# EAGLE board Conv_LLS (EAGLE 9.6.2)
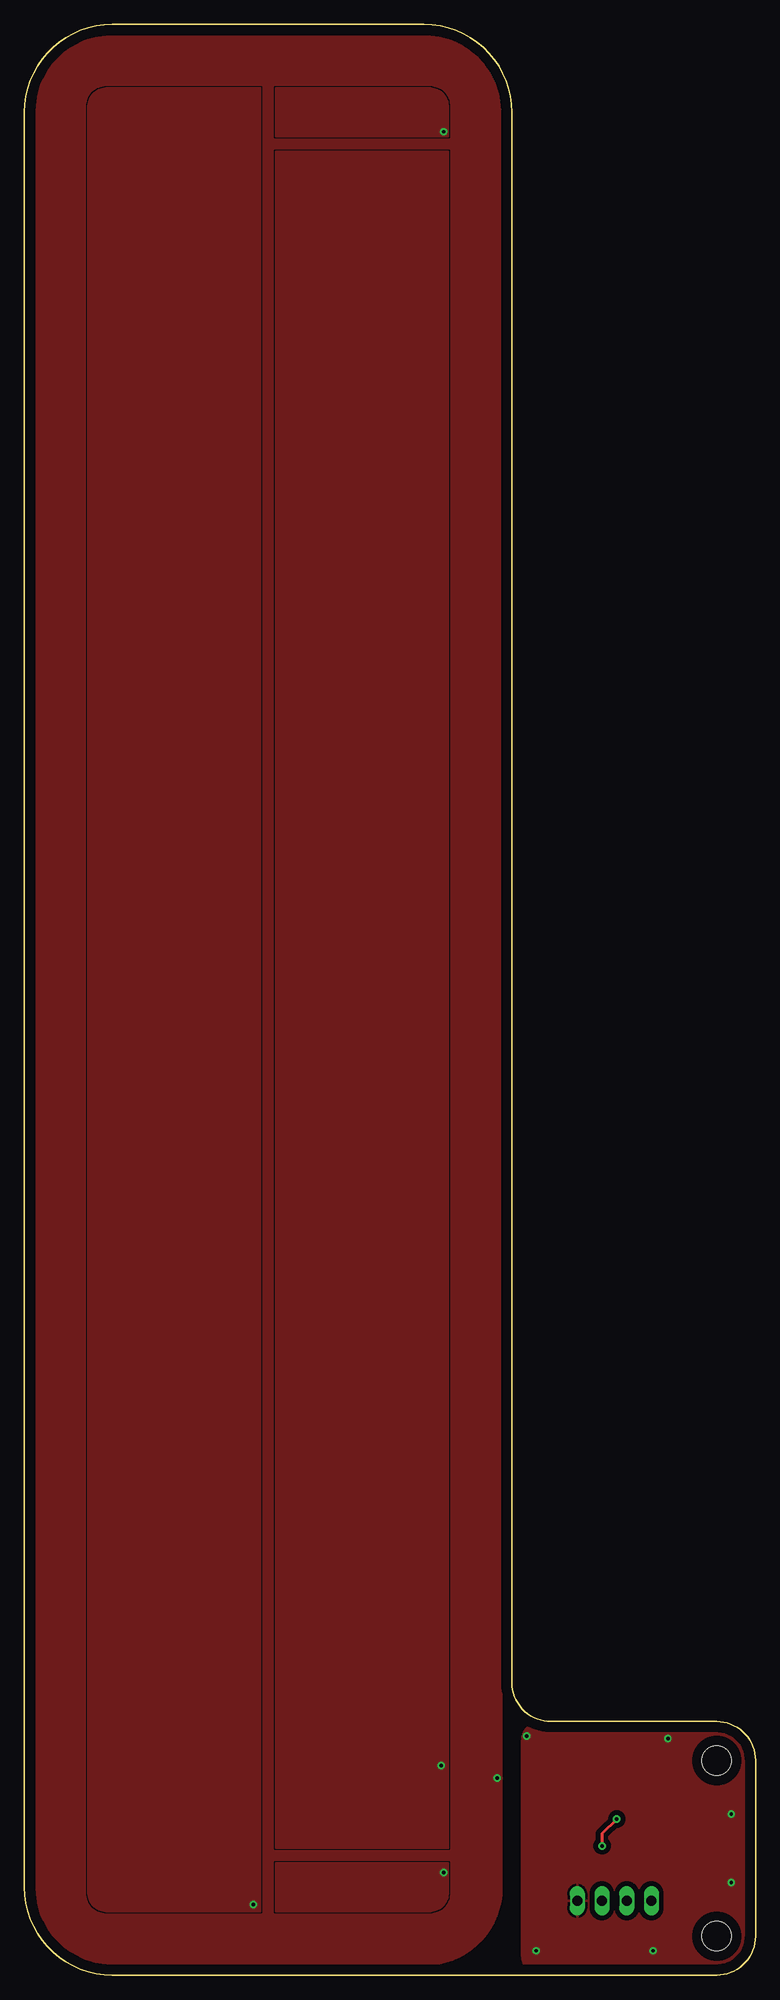
[diagram p0: board, top side]
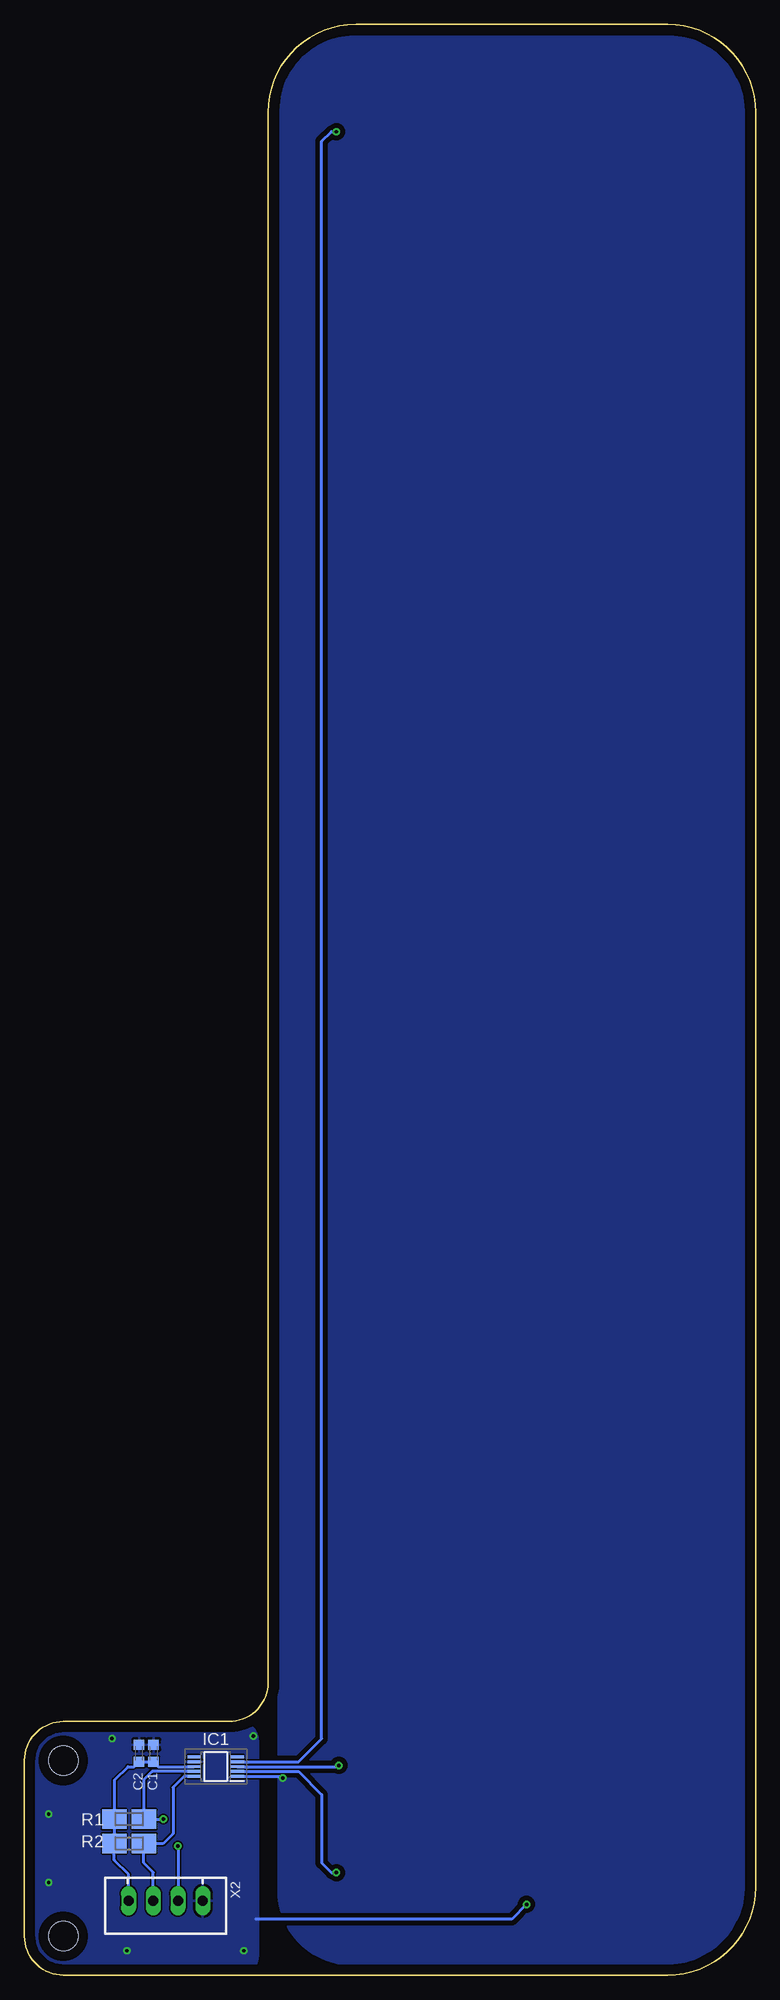
[diagram p1: board, bottom side, seen from below]

Size 75 x 200 mm. Coordinates in mm from the lower left corner, seen from the top.
Outline: 50,191 50,30 arc90 54,26 71,26 arc-90 75,22 75,4 arc-90 71,0 9,0 arc-90 0,9 0,191 arc-90 9,200 41,200 arc-90 50,191
Copper layers (1*16): Top 0.035mm / dielectric 1.5mm / Bottom 0.035mm
Design rules "default": minimum track width 6mil, minimum drill 0.35mm, track to track 6mil, track to pad 6mil, pad to pad 6mil, via to via 6mil, smd to smd 6mil, copper to edge 40mil, drill to drill 6mil, minimum pad ring 10mil, minimum via ring 8mil, stop-mask expansion 4mil, vias tented up to drill 0mil, thermal gap 10mil
Holes 3 mm at 71,4 71,22

## Footprints (pad centres in the part's own frame; a part is rotated, then mirrored left to right if it is on the bottom)
C0603K = smd 1.05 x 1.08: 1 -0.875,0; 2 0.875,0
SOP50P490X110-10N = smd 1.4 x 0.3: 1 -2.2,1; 2 -2.2,0.5; 3 -2.2,0; 4 -2.2,-0.5; 5 -2.2,-1; 6 2.2,-1; 7 2.2,-0.5; 8 2.2,0; 9 2.2,0.5; 10 2.2,1
SMK = smd 2.5 x 2: 1 1.524,0; 2 -1.524,0
JST-XH-04-PACKAGE-LONG-PAD = drill 1.016 long: 1 -3.81,0; 2 -1.27,0; 3 1.27,0; 4 3.81,0

## Placement (x,y rotation side)
C1  10uF  [C0603K]  61.75,22.75 270 bottom
C2  0.1uF  [C0603K]  63.25,22.75 270 bottom
IC1  FDC1004QDGSRQ1  [SOP50P490X110-10N]  55.38,21.38 180 bottom
R1  2.4K  [SMK]  64.25,16 0 bottom
R2  2.4K  [SMK]  64.25,13.5 0 bottom
X2  JST-XH-04-PIN-LONG-PAD  [JST-XH-04-PACKAGE-LONG-PAD]  60.51,7.62 180 bottom

## Library data of the parts
C1 C2 = rcl; SPICEPREFIX: C
IC1 = FDC1004QDGSRQ1; DESCRIPTION: Automotive, 4-Channel Capacitance-to-Digital Converter for Capacitive Sensing (Cap Sensing); HEIGHT: 1.1mm; MANUFACTURER_NAME: Texas Instruments; MANUFACTURER_PART_NUMBER: FDC1004QDGSRQ1; MOUSER_PART_NUMBER: 595-FDC1004QDGSRQ1; MOUSER_PRICE-STOCK: https://www.mouser.co.uk/ProductDetail/Texas-Instruments/FDC1004QDGSRQ1?qs=GURawfaeGuB3eQlJTvwB2A%3D%3D
R1 R2 = resistor-shunt; OC_FARNELL: unknown; OC_NEWARK: unknown
X2 = Rembrandt Electronics - JST XH Connectors v1-0

## Nets
+3V3: C1.2 C2.2 IC1.8 R1.2 R2.2 X2.4
ENV: IC1.4
GND: C1.1 C2.1 IC1.7 X2.1
LEVEL: IC1.3
REF: IC1.2
SCL: IC1.9 R1.1 X2.2
SDA: IC1.10 R2.1 X2.3
SHIELD1: IC1.1

## Tracks (layer width: path | path; a pad name or v marks a point on that pad's centre or on a via)
+3V3
  Bottom 0.3: R2.2 R1.2 65.77,19.98 64.38,21.38 | R2.2 65.75,13.48 | 64.37,21.38 64.38,21.38 | X2.4 64.32,10.32 65.77,11.77 R2.2 | 64.38,21.38 63.75,21.38 C2.2 C1.2 61.26,21.38 IC1.8
ENV  (via drill 0.35)
  Bottom 0.3: IC1.4 46.87,21.88 44.5,24.25 44.5,188 43.5,189 v43,189
  pour Top (isolate 1.5): 25.75,193.5 25.75,188.5 43.5,188.5 43.5,191.5 arc90 41.5,193.5
GND  (via drill 0.35)
  Bottom 0.3: 56.75,7.67 X2.1 | 23.5,7 v23.5,7.25 25,5.75 51.25,5.75
  other vias: 66,24.25 51.5,24.5 72.5,16.5 72.5,9.5 64.5,2.5 52.5,2.5
  pour Top (isolate 1.5): 24.25,193.5 8.5,193.5 arc90 6.5,191.5 6.5,8.5 arc90 8.5,6.5 24.25,6.5
  pour Top (isolate 0.5, rank 2): 71,0 53,0 arc-90 51,2 51,24 arc-90 53,26 71,26 arc-90 75,22 75,4 arc-90
  pour Bottom: 71,26 53,26 arc90 51,24 51,2 arc90 53,0 71,0 arc90 75,4 75,22 arc90
LEVEL  (via drill 0.35)
  Bottom 0.3: IC1.3 42.87,21.38 v42.75,21.5
  pour Top (isolate 1.5): 25.75,13 43.5,13 43.5,187 25.75,187
REF  (via drill 0.35)
  Bottom 0.3: IC1.2 46.88,20.88 44.5,18.5 44.5,11.5 43.5,10.5 v43,10.5
  pour Top (isolate 1.5): 43.5,11.5 43.5,8.5 arc-90 41.5,6.5 25.75,6.5 25.75,11.5
SCL  (via drill 0.35)
  Top 0.3: v60.75,16 59.25,14.5 v59.25,13.25
  Bottom 0.3: IC1.9 61.87,20.88 62.75,20 62.75,16.02 R1.1 v60.75,16 | v59.25,13.25 X2.2
SDA
  Bottom 0.3: X2.3 61.78,10.53 62.75,11.5 62.75,13.48 | 62.75,13.48 R2.1 | IC1.10 58.62,20.38 59.75,19.25 59.75,14.5 60.77,13.48 62.75,13.48
SHIELD1  (via drill 0.35)
  Bottom 0.3: IC1.1 48.68,20.38 v48.5,20.2
  pour Bottom (isolate 0.5, rank 2): 49,191 49,8.75 arc-90 41.25,1 8.75,1 arc-90 1,8.75 1,191 arc-90 9,199 41,199 arc-90
  pour Top (rank 5): 9,199 41,199 arc-90 49,191 49,9 arc-90 41,1 9,1 arc-90 1,9 1,191 arc-90
SPACE
  pour Top (isolate 1.5, rank 2): 41.5,6.5 8.5,6.5 8.5,193.5 41.5,193.5 arc-90 43.5,191.5 43.5,8.5 arc-90
SPACE2
  pour Top (isolate 1.5, rank 3): 25.75,6.5 41.5,6.5 arc90 43.5,8.5 43.5,191.5 arc90 41.5,193.5 25.75,193.5